# Altium PCB Power.PcbDoc
Units mil, origin at the board's own origin, x right, y up, seen from the top; angles counter-clockwise.
Board outline 1220.47 x 1511.81 mil, 2 copper layers (Top Layer, Bottom Layer), stack 21 mil thick; 47 components, 42 nets, 154 pads, 129 vias.
Unrouted connection lines stored in the file: 29.
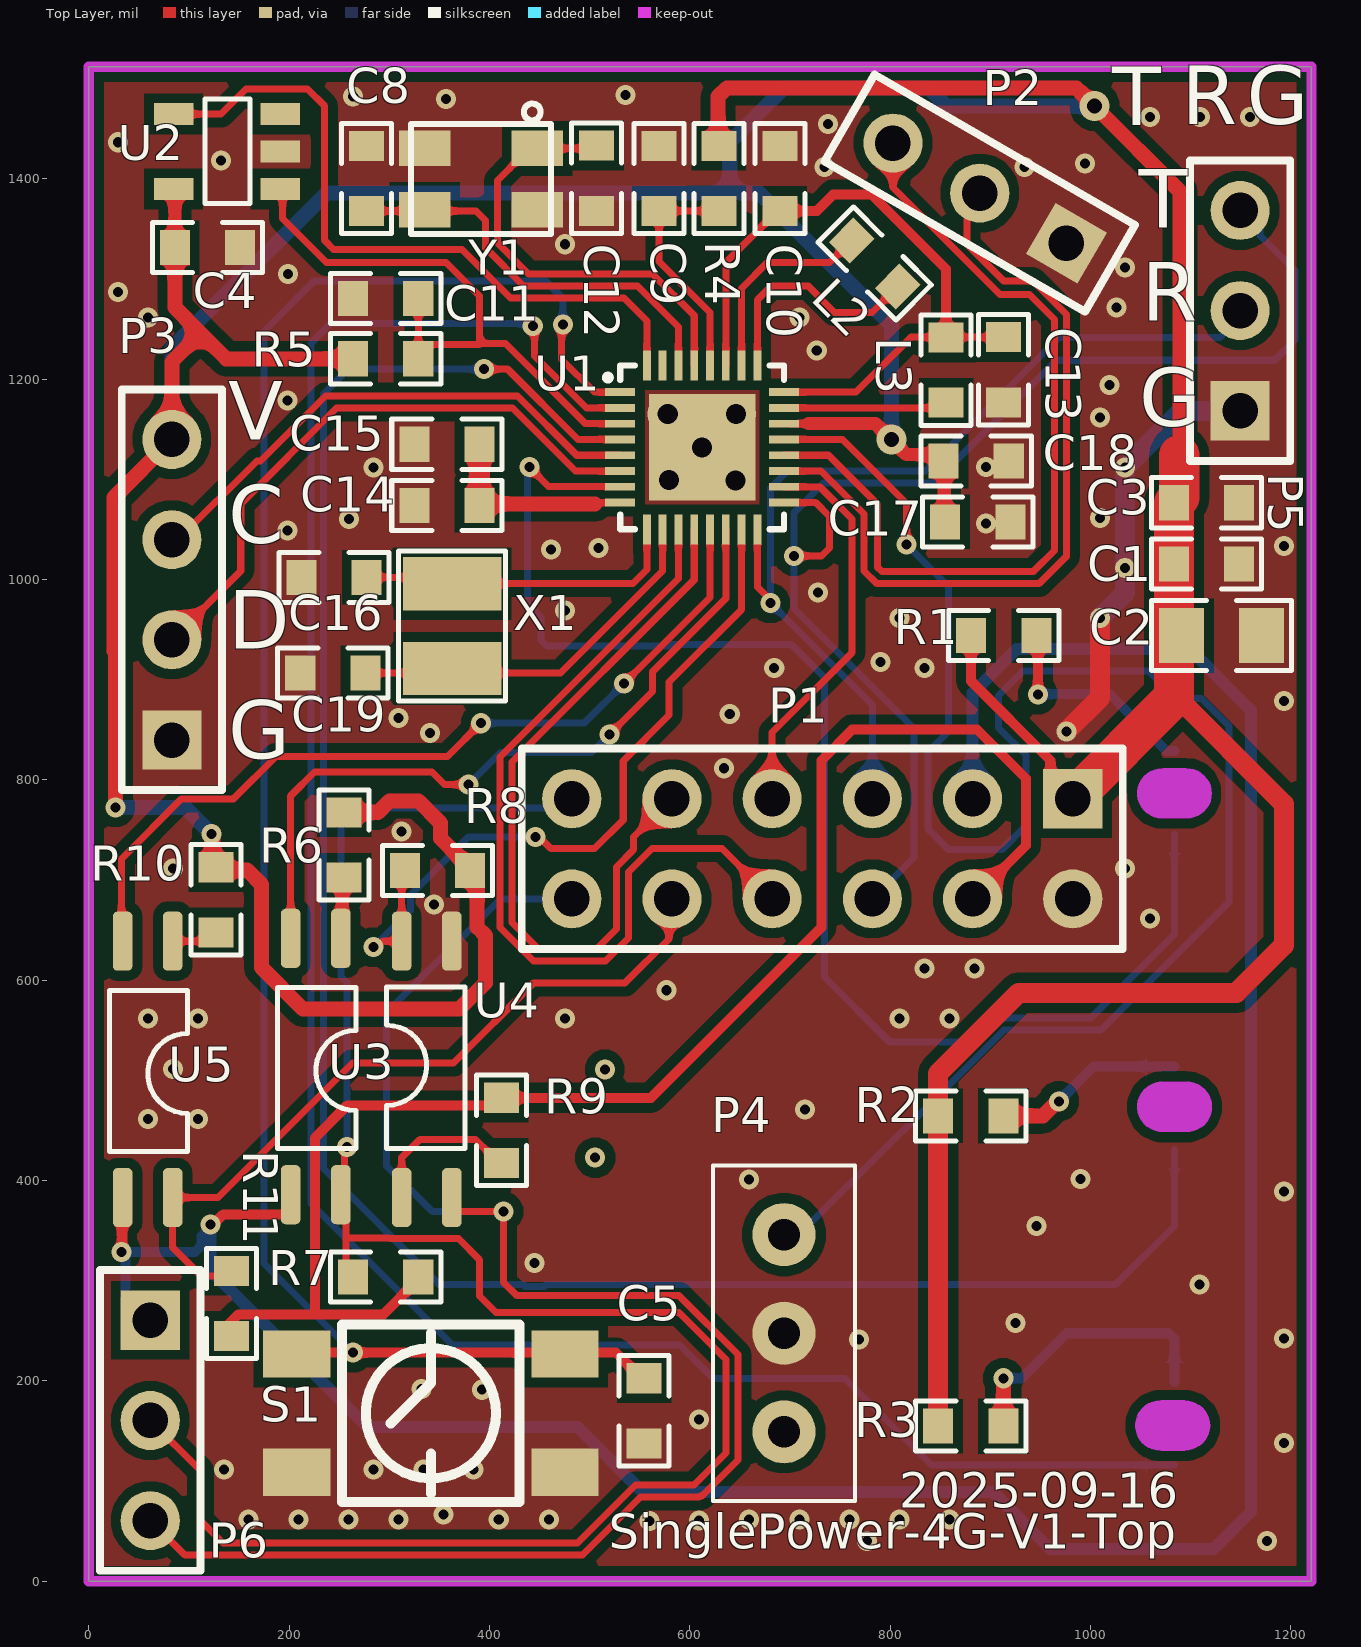
[diagram p0: Top Layer view]
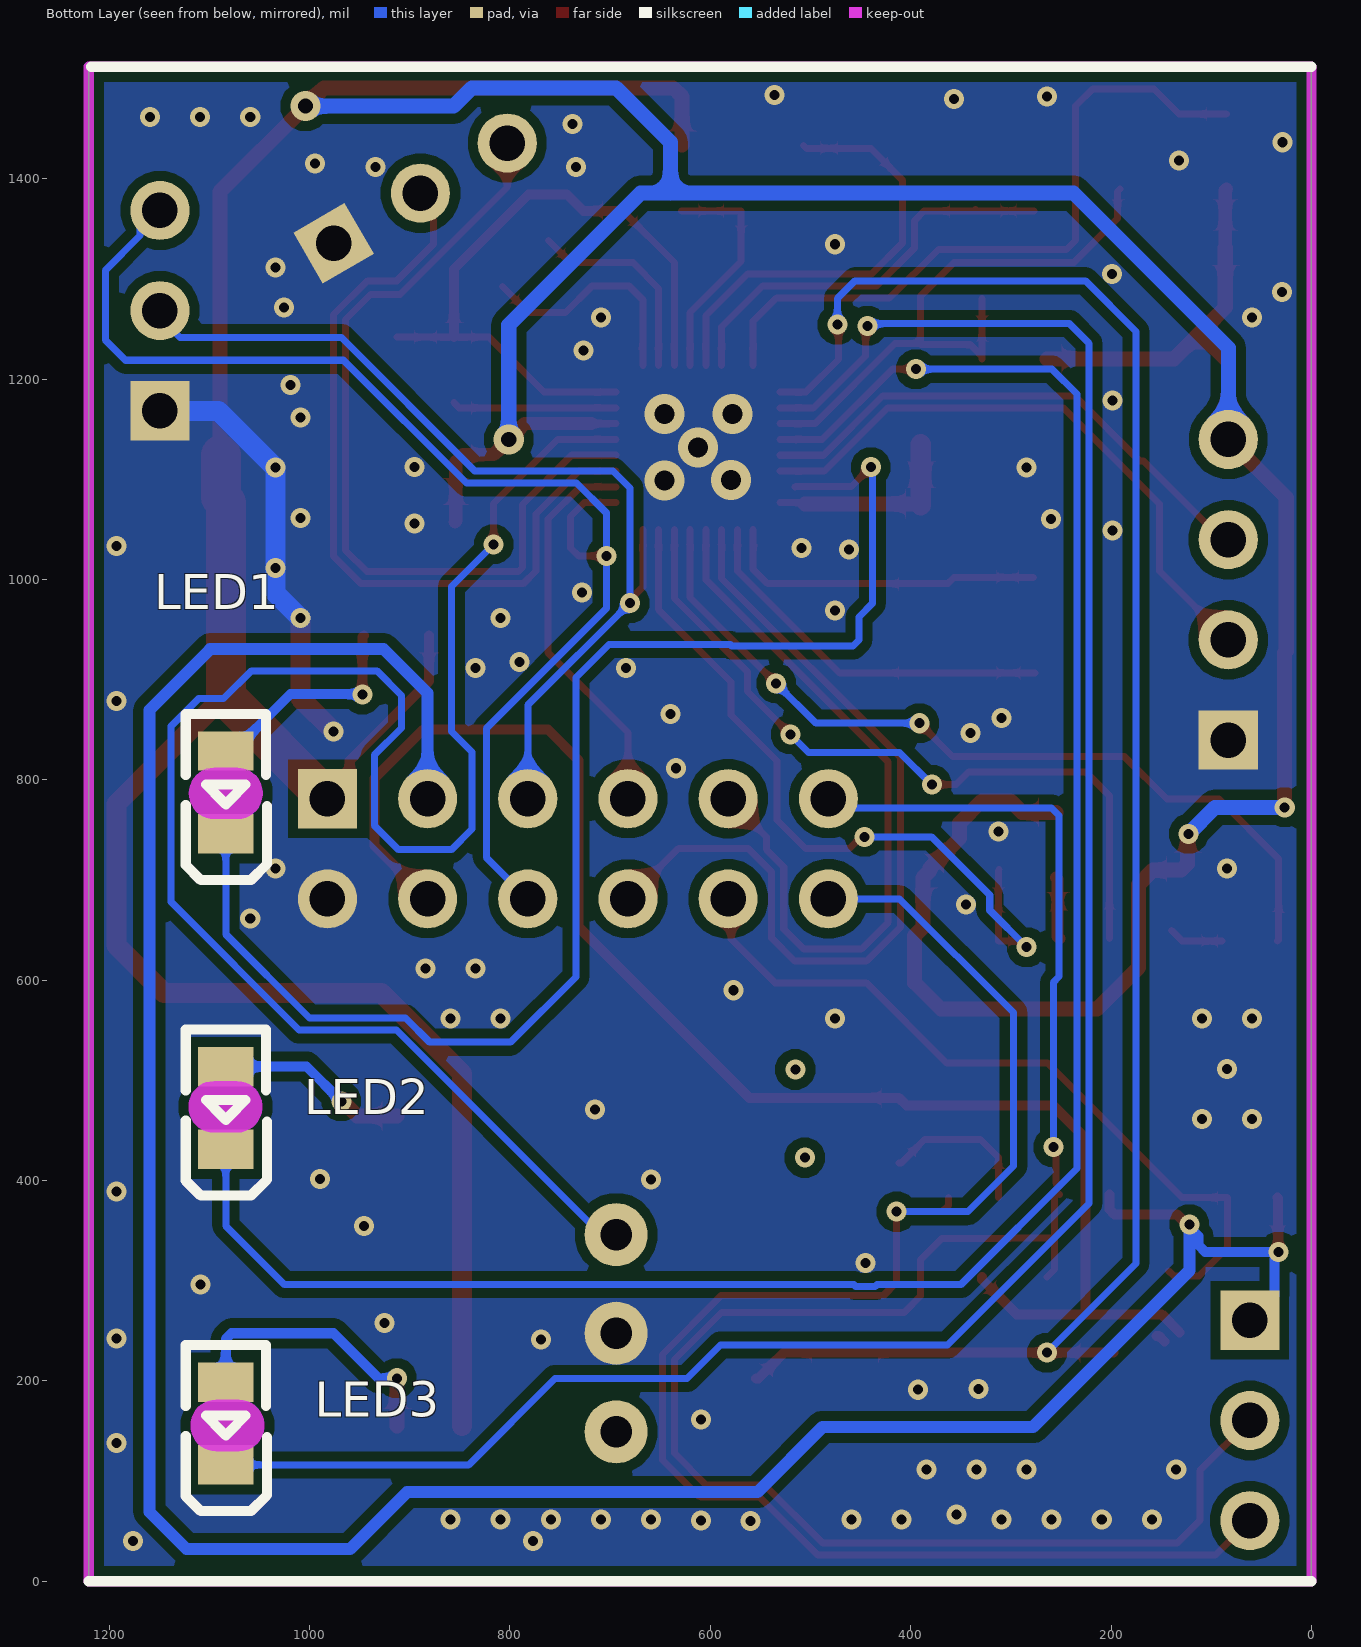
[diagram p1: Bottom Layer view, seen from below]

## Layer stack, top to bottom
Top Solder: solder mask 0.4, Solder Resist, Dk 3.5
Top Layer: signal copper 1.4
Dielectric 2: prepreg 2.8, Composite dielectric, Dk 4.1
Dielectric 1: prepreg 12.6, Composite dielectric, Dk 4.1
Dielectric 3: prepreg 2.8, Composite dielectric, Dk 4.1
Bottom Layer: signal copper 1.4
Bottom Solder: solder mask 0.4, Solder Resist, Dk 3.5

## Board outline
0,0 0,1511.81 1220.47,1511.81 1220.47,0
cut-out: 1070.22,130.42 cw(c1070.22,155.44) 1070.22,180.45 1093.85,180.45 cw(c1093.85,155.44) 1118.87,155.44 cw(c1093.85,155.44) 1093.85,130.42
cut-out: 1072.09,448.6 cw(c1072.09,473.62) 1072.09,498.63 1095.72,498.63 cw(c1095.72,473.62) 1120.74,473.62 cw(c1095.72,473.62) 1095.72,448.6
cut-out: 1071.88,761.52 cw(c1071.88,786.53) 1071.88,811.55 1095.52,811.55 cw(c1095.52,786.53) 1120.53,786.53 cw(c1095.52,786.53) 1095.52,761.52

## Design rules (kind name [scope] priority, off if disabled: settings)
Clearance "Via to pad" [IsVia vs IsPad] p1: gap=10 ignorepadtopadclearanceinfootprint=FALSE
Clearance Ploy [InPoly] p2: gap=10 ignorepadtopadclearanceinfootprint=FALSE
Clearance "Track to pad" [IsTrack vs IsPad] p3: gap=8 ignorepadtopadclearanceinfootprint=FALSE
Clearance "Track to track" [IsTrack vs IsTrack] p4: gap=5 ignorepadtopadclearanceinfootprint=FALSE
Clearance "Via to Track" [IsVia vs IsTrack] p5: gap=10 ignorepadtopadclearanceinfootprint=FALSE
Clearance "Via To Via" [IsVia vs IsVia] p6: gap=10 ignorepadtopadclearanceinfootprint=FALSE
ComponentClearance [All] p1: gap=0 collisioncheckmode=3 verticalgap=0 showdistances=FALSE
DiffPairsRouting [All] p1: maxlimit=10 minlimit=7 mostfreqgap=7 toplayer_minwidth=5 toplayer_maxwidth=100 toplayer_prefwidth=7 bottomlayer_minwidth=5 bottomlayer_maxwidth=100 bottomlayer_prefwidth=7 maxuncoupledlength=500
HoleSize [All] p1: absolutevalues=TRUE maxlimit=200 minlimit=1 maxpercent=80.000 minpercent=20.000
HoleToHoleClearance [All] p1: gap=5 allowstackedmicrovias=TRUE
MinimumSolderMaskSliver [All] p1: minsoldermaskwidth=0
PolygonConnect [All vs (InPadClass('All Pads'))] p1: connectstyle=Direct reliefconductorwidth=10 reliefentries=4 polygonreliefangle="90 Angle" airgapwidth=10
PolygonConnect GND焊盘 [InNet('GND_1') vs (InPadClass('All Pads'))] p2: connectstyle=Relief reliefconductorwidth=10 reliefentries=4 polygonreliefangle="90 Angle" airgapwidth=10
PolygonConnect GND过孔 [All vs IsVia] p3: connectstyle=Direct reliefconductorwidth=10 reliefentries=4 polygonreliefangle="90 Angle" airgapwidth=10
RoutingVias RoutingVias_1 [InNet('AGND_1')] p1: holewidth=10 width=20 viastyle="Through Hole" minholewidth=10 minwidth=20 maxholewidth=28 maxwidth=50
RoutingVias [All] p2: holewidth=10 width=20 viastyle="Through Hole" minholewidth=10 minwidth=20 maxholewidth=28 maxwidth=50
SilkToSilkClearance [All] p1: silktosilkclearance=0
SilkToSolderMaskClearance [IsPad] p1: minsilkscreentomaskgap=0 clearancetoexposedcopper=TRUE
SolderMaskExpansion [All] p1: expansion=1 istentingtop=FALSE
Width [All] p1: maxlimit=300 minlimit=5 preferedwidth=7 minimp=50.000000 maximp=50.000000 favimp=50.000000
23 further rules are at their usual default settings.

## Classes and differential pairs
component class MCU: C4 C5 C8 C9 C10 C11 C12 C13 C14 C15 C16 C17 C18 C19 L2 L3 LED1 LED2 LED3 P2 P3 P4 P5 P6 R1 R2 R3 R4 R5 R6 R7 R8 R9 R10 R11 S1 U1 U2 U3 U4 U5 X1 Y1
component class 连接: C1 C2 C3 P1

## Components (designator, comment, footprint, x,y, rotation, side; value= is the part's Value field where it differs from the comment)
C1 "10uF/25V" 0603R 1148.31,1015.51 r180 top
C2 "22uF/10V" 0805R 1090.81,944 r0 top
C3 "104/10V" 0603R 1148.31,1076.6 r180 top
C4 "104" 0603R 150.99,1331.2 r180 top
C5 "104" 0603R 554.4,202.62 r270 top
C8 "12pF" 0603r 277.11,1432.82 r270 top
C9 "1uF/10V" 0603R 569.33,1432.82 r270 top
C10 "1uF/10V" 0603R 689.97,1432.82 r270 top
C11 "1uF/10V" 0603R 263.93,1280.48 r0 top
C12 "12pF" 0603r 506.95,1368.03 r90 top
C13 "1uF/10V" 0603R 912.97,1176.82 r90 top
C14 "2.2uF/10V" 0603R 324.96,1073.99 r0 top
C15 "104/10V" 0603R 324.96,1135.01 r0 top
C16 "10pF" 0603r 277.45,1002.12 r180 top
C17 "104/10V" 0603R 919.9,1057.45 r180 top
C18 "10uF/10V" 0603R 918.34,1118.1 r180 top
C19 "10pF" 0603r 211.11,906.72 r0 top
L2 "1.3nH" 0603R 761.57,1338.34 r315 top
L3 "4.7uH" 0603R 855.85,1176.44 r90 top
LED1 "LED" LED0805 1083.7,787.4 r90 bottom
LED2 "LED" LED0805 1083.7,472.44 r90 bottom
LED3 "LED" LED0805 1083.7,157.48 r90 bottom
P1 "Header 6X2" HDR2X6 982.2,781.18 r180 top
P2 "Header 3" HDR1X3 976,1335.62 r150 top
P3 "Header 4" HDR1X4 82.95,839.74 r90 top
P4 "Header 3" Ss-12D00 623.17,414.88 r270 top
P5 "Header 3" HDR1X3 1149.38,1168.4 r90 top
P6 "Header 3" HDR1X3 61.41,260.51 r270 top
R1 "Res2" 0603R 880.85,944 r0 top value=1K
R2 "Res2" 0603R 847.97,464.57 r0 top value=1K
R3 "Res2" 0603R 847.97,154.88 r0 top value=1K
R4 "0R/5%" 0603R 628.95,1432.82 r270 top
R5 "10K/5%" 0603R 263.93,1220.31 r0 top
R6 "471" 0603R 254.92,767.46 r270 top
R7 "102" 0603R 263.93,303.67 r0 top
R8 "102" 0603R 315.71,709.54 r0 top
R9 "471" 0603R 411.88,482.62 r270 top
R10 "471" 0603R 126.94,712.76 r270 top
R11 "102" 0603R 142.42,309.89 r270 top
S1 "SW2" 4.5*4.5贴片4脚独立按键 341.47,167.72 r180 top
U1 "N32WB031KEQ6-2" "QFN32 4X4" 612.29,1131.88 r0 top
U2 "CAT823ZTDI-GT3" SOT-23-5 191.07,1389.76 r90 top
U3 "EL3H7" EL3H7 251.61,641.79 r270 top
U4 "EL3H7" EL3H7 312.41,383.04 r90 top
U5 "EL3H7" EL3H7 83.81,638.94 r270 top
X1 "32.768K/7pF" Y3215 362.96,953.48 r90 top
Y1 "32MHZ/8PF" 3225 391.52,1399.74 r0 top

## Footprints (in the part's own frame and the unit in brackets; to place one, negate y for a bottom-side part, rotate by r counter-clockwise, add the part's x,y. Pads: shape width x height; smd on the part's side, far side on the other; paste and mask are expansions set on the pad)
4.5*4.5贴片4脚独立按键 [mm]
  rect 1.7x1.2 smd: 1(-3.4,-1.5) 1(3.4,-1.5) 2(-3.4,1.5) 2(3.4,1.5)
  silkscreen extent -2.25,-2.25 2.25,2.25
0603R [mil]
  rect 30x35 smd: 1(0,0) 2(65,0)
  silkscreen extent -23,-25 88,25
0603r [mil]
  rect 30x35 smd: 1(0,0) 2(65,0)
  silkscreen extent -23,-25 88,25
0805R [mil]
  rect 45x55 smd: 1(0,0) 2(80,0)
  silkscreen extent -30,-35 110,35
3225 [mm]
  rect 1.3x0.9 smd: 1(1.425,0.775) 2(-1.425,0.775) 3(-1.425,-0.775) 4(1.425,-0.775)
  silkscreen extent -1.78,-1.4 1.78,1.91, body extent -1.65,-1.3 1.55,1.2, height 0.61
EL3H7 [mm]
  rrect50% 1.5x0.5 smd: 1(0,0) 2(0,-1.27) 3(6.5,-1.27) 4(6.5,0)
  silkscreen extent 1.24,-1.6 5.33,0.38
HDR1X3 [mm] "Connector; Header; 3 Position"
  rect 1.5x1.5 hole 0.9: 1(0,0)
  round 1.5 hole 0.9: 2(2.54,0) 3(5.08,0)
  silkscreen extent -1.27,-1.27 6.35,1.27
HDR1X4 [mm] "Connector; Header; 4 Position"
  rect 1.5x1.5 hole 0.9: 1(0,0)
  round 1.5 hole 0.9: 2(2.54,0) 3(5.08,0) 4(7.62,0)
  silkscreen extent -1.27,-1.27 8.89,1.27
HDR2X6 [mm] "Connector; Header; 6x2 Position"
  rect 1.5x1.5 hole 0.9: 1(0,0)
  round 1.5 hole 0.9: 2(0,2.54) 3(2.54,0) 4(2.54,2.54) 5(5.08,0) 6(5.08,2.54) 7(7.62,0) 8(7.62,2.54) 9(10.16,0) 10(10.16,2.54) 11(12.7,0) 12(12.7,2.54)
  silkscreen extent -1.27,-1.27 13.97,3.81
LED0805 [mm]
  rect 1x1.4 smd: 1(1.05,0) 2(-1.05,0)
  silkscreen extent -2.22,-1.04 1.99,1.01
"QFN32 4X4" [mm]
  rect 0.76x0.2 smd paste-100 mask+0.051: 1(-2.08,1.4) 2(-2.08,1) 3(-2.08,0.6) 4(-2.08,0.2) 5(-2.08,-0.2) 6(-2.08,-0.6) 7(-2.08,-1) 8(-2.08,-1.4) 17(2.08,-1.4) 18(2.08,-1) 19(2.08,-0.6) 20(2.08,-0.2) 21(2.08,0.2) 22(2.08,0.6) 23(2.08,1) 24(2.08,1.4)
  rect 0.2x0.76 smd paste-100 mask+0.051: 9(-1.4,-2.08) 10(-1,-2.08) 11(-0.6,-2.08) 12(-0.2,-2.08) 13(0.2,-2.08) 14(0.6,-2.08) 15(1,-2.08) 16(1.4,-2.08) 25(1.4,2.08) 26(1,2.08) 27(0.6,2.08) 28(0.2,2.08) 29(-0.2,2.08) 30(-0.6,2.08) 31(-1,2.08) 32(-1.4,2.08)
  rect 2.7x2.7 smd paste-100 mask+0.051: 33(0,0)
  silkscreen extent -2.46,-2.08 2.08,2.08
SOT-23-5 [mm]
  rect 0.55x1 smd: 1(0,0) 2(0.95,0) 3(1.9,0) 4(1.9,2.7) 5(0,2.7)
  silkscreen extent -0.37,0.76 2.29,1.91
Ss-12D00 [mm]
  round 1.6 hole 0.8: 1(1.75,1.8) 2(4.25,1.8) 3(6.75,1.8)
  silkscreen extent 0,0 8.5,3.6
Y3215 [mm]
  rect 1.35x2.5 smd: 1(-1.075,0) 2(1.075,0)
  silkscreen extent -1.9,-1.35 1.9,1.37

## Part data
C1 C4 C5 C8 C12 C16 C19: library part CAP
C2: library part "Cap Pol1", "Polarized Capacitor (Radial)", LatestRevisionDate=17-Jul-2002, LatestRevisionNote="Re-released for DXP Platform.", PackageDescription="Polarized Capacitor (Radial); 2 Leads", PackageReference=RB7.6-15, Published=8-Jun-2000, Publisher="Altium Limited"
C3 C9 C10 C11 C13 C14 C15 C17 C18: library part CAP_1
L2 L3: library part Inductor, "Inductor", Code_IEC=1005, Code_JEITA=0402, LatestRevisionDate=29-May-2009, LatestRevisionNote="IPC-7351 Footprint Added.", PackageDescription="Chip Inductor", PackageReference=0402-A, Published=8-Jun-2000, Publisher="Altium Limited"
P1: "Header, 6-Pin, Dual row", LatestRevisionDate=17-Jul-2002, LatestRevisionNote="Re-released for DXP Platform.", Publisher="Altium Limited"
P2 P4 P5 P6: "Header, 3-Pin", LatestRevisionDate=17-Jul-2002, LatestRevisionNote="Re-released for DXP Platform.", Publisher="Altium Limited"
P3: "Header, 4-Pin", LatestRevisionDate=17-Jul-2002, LatestRevisionNote="Re-released for DXP Platform.", Publisher="Altium Limited"
R4 R5 R6 R7 R8 R9 R10 R11: library part RES
U1: JLCPCB Part Class="Extended Part", Manufacturer=Nations(国民技术), Add into BOM=yes, Convert to PCB=yes, Device=N32WB031KEQ6-2, LCSC Part Name=N32WB031KEQ6-2, Manufacturer Part=N32WB031KEQ6-2, Supplier=LCSC, Supplier Footprint=QFN-32, Supplier Part=C2981446, Symbol=N32WB031KEQ6-2
U2: library part CAT823
U3 U4 U5: library part Optical_Coupler_1
X1: library part XTAL
Y1: library part 12MHz无源
R1 R2 R3: LatestRevisionDate=17-Jul-2002, LatestRevisionNote="Re-released for DXP Platform.", PackageDescription="Axial Device, Thru-Hole; 2 Leads; 0.4 in Pin Spacing", PackageReference=AXIAL-0.4, Published=8-Jun-2000, Publisher="Altium Limited"

## Via types
v1: diameter 20, hole 10, Top Layer to Bottom Layer, 122 vias
v2: diameter 40, hole 20, Top Layer to Bottom Layer, 5 vias
v3: diameter 30, hole 15, Top Layer to Bottom Layer, 2 vias

## Nets (pads, with @x,y where several pads share a name; then routed paths per layer and width w, separated by ;. In a path a pad name is that pad's centre, name@x,y a point inside that pad or via, vN(x,y) a via of type N, cw(c..) or ccw(c..) an arc to the next point about the centre after c; other vN are vias at no path point)
4G_MCU_RXD: P1.6 P5.3 U1.17 | length 1296.2
  Top Layer w7: U1.17 725.69,1076.76 739.49,1062.95 739.49,1031.57 731.37,1023.45 v1(703.86,1023.45)
  Bottom Layer w7: P1.6 823.67,722.64 823.67,851.21 703.86,971.02 v1(703.86,1023.45) 703.86,1066.65 733.46,1096.25 843.53,1096.25 966.11,1218.83 1183.85,1218.83 1203.96,1238.95 1203.96,1308.56 1169.23,1343.3 1169.23,1361.51 P5.3@1159.27,1371.47
4G_MCU_TXD: P1.5 P5.2 U1.16 | length 984.7
  Top Layer w7: U1.16 667.41,992.47 680.36,979.53 v1(680.36,976.43)
  Bottom Layer w7: P1.5 782.2,874.58 v1(680.36,976.43) 680.36,1091.28 697.33,1108.25 835.16,1108.25 968.35,1241.44 1129.24,1241.44 P5.2@1159.27,1271.47
4G_Reset: P1.7 U1.18 | length 393.3
  Top Layer w7: P1.7 682.2,847.09 762.01,926.89 762.01,1060.21 729.71,1092.51 U1.18
BL0942_Control: P1.10 R11.1 U5.4 | length 766
  Top Layer w7: R11.1 137.24,304.71 112.27,304.71 83.81,333.16 U5.4 128.97,383.04 263.29,517.36 364.15,517.36 444.19,597.4 535.41,597.4 579.16,641.15 579.16,678.14 P1.10
BL0942_RXD: P1.11 P6.2 R7.1 U3.4 | length 1960
  Top Layer w7: P6.2 111.41,110.51 111.41,60.51 133.87,38.06 487.81,38.06 545.93,96.17 604.22,96.17 635.93,127.88 635.93,221.42 589.04,268.31 406.47,268.31 390.12,284.66 390.12,320.9 369.01,342.01 300.69,342.01 299.9,342.8 256.58,342.8 ; U3.4 U3.4@254.82,389.1 ; v1(257.64,433.44) 255.16,430.95 255.16,397.33 251.75,393.93 256.58,389.1 256.58,342.8 ; R7.1 256.58,311.01 256.58,342.8 ; P1.11 P1.11@490.3,789.27
  Bottom Layer w7: v1(257.64,433.44) 257.64,597.82 251.9,603.57 251.9,764.43 259.24,771.78 472.8,771.78 P1.11
BL0942_TXD: P1.12 P6.3 U4.2 | length 1669.8
  Top Layer w7: P6.3 95.87,26.06 492.78,26.06 550.9,84.17 609.19,84.17 610.08,85.06 611.97,85.06 647.93,121.01 647.93,226.39 589.28,285.04 427.34,285.04 414,298.38 v1(414,368.9) 368.64,368.9 362.41,375.13 U4.2 ; P1.12 P1.12@482.2,688.65
  Bottom Layer w7: v1(414,368.9) 342.93,368.9 297.41,414.42 297.41,567.61 410.98,681.18 P1.12
Dog_WDI: U1.32 U2.4 | length 701.6
  Top Layer w7: U2.4 131.98,1464.56 157.12,1489.71 218.29,1489.71 235.54,1472.46 235.54,1338.29 244.27,1329.55 372.42,1329.55 421.04,1280.93 534.15,1280.93 557.17,1257.91 U1.32
GND: C1.1 C2.2 C3.1 C4.1 C5.2 C8.1 C9.1 C10.1 C11.1 C12.1 C13.1 C14.1 C15.1 C16.2 C17.1 C18.1 C19.1 P1.2 P2.1 P3.1 P4.2 P5.1 S1.2 U1.33 U2.2 U4.3 Y1.2 Y1.4 | length 425.9
  Top Layer w20: v1(976.09,848.42) 1009.27,881.59 v1(1009.27,961.56)
  Bottom Layer w20: v1(1009.27,961.56) 1034.27,986.56 v1(1034.27,1011.56) v1(1034.27,1111.56) 1091.11,1168.4 P5.1
  other v1: 776.83,40 1176.36,40 559.95,59.99 609.27,60.67 159.27,61.56 209.27,61.56 259.27,61.56 309.27,61.56 409.27,61.56 459.27,61.56 659.27,61.56 709.27,61.56 759.27,61.56 809.27,61.56 859.27,61.56 354.33,66.5 134.91,111.56 284.27,111.56 334.27,111.56 384.27,111.56 1193,138.02 609.27,161.56 332.36,191.92 392.75,191.17 768.98,241.26 1193,242.34 925.08,257.74 1108.8,296.01 445.11,317.9 945.85,354.7 1193,389.1 659.27,400.89 989.76,401.41 59.27,461.56 109.27,461.56 714.97,471.13 84.27,511.56 59.27,561.56 109.27,561.56 475.59,561.56 809.27,561.56 859.27,561.56 576.86,589.94 834.27,611.56 884.27,611.56 1059.27,661.56 344.57,675.41 84.27,711.56 1034.27,711.56 312.41,748.26 634.27,811.56 340.43,846.75 309.27,861.56 639.86,865.85 1193,878.67 684.27,911.56 834.27,911.56 790.41,917.7 809.27,961.56 475.59,969 727.98,986.82 461.52,1030.05 508.91,1031.57 1193,1033.39 198.4,1048.99 895.47,1055.88 259.95,1060.21 1009.27,1061.56 284.27,1111.56 895.47,1112.19 1009.27,1161.56 198.4,1178.55 1018.97,1193.94 726.72,1228.72 59.27,1261.56 709.27,1261.56 1025.72,1271.47 29.27,1287.07 199.02,1304.98 1034.27,1311.56 475.59,1334.62 734.27,1411.56 934.27,1411.56 994.45,1415.32 131.98,1418.03 29.03,1436.44 737.72,1454.74 1059.27,1461.56 1109.27,1461.56 1159.27,1461.56 356.73,1479.76 263.93,1481.99 535.91,1483.56
  other v2: 645.73,1098.86 579.37,1099.41 612.29,1131.88 577.96,1165.38 645.89,1165.3
GND_G: P1.3 P6.1 U3.3 U5.3 | length 2782.5
  Top Layer w10: v1(32.63,328.76) 33.22,329.35 33.22,382.45 U5.3 ; v1(121.71,356.33) 124.42,356.33 134.37,366.28 196.77,366.28 201.61,371.12 U3.3
  Bottom Layer w10: P6.1 36.89,285.04 36.89,321.79 32.63,326.05 v1(32.63,328.76) 105.96,328.76 112.73,335.53 112.73,344.64 v1@121.71,353.62
  Bottom Layer w12: v1(121.71,356.33) 121.71,353.62 121.71,310.19 277.94,153.96 488.03,153.96 552.83,89.15 902.58,89.15 959.73,32 1122.81,32 1160.05,69.24 1160.05,869.59 1099.24,930.4 926.09,930.4 882.2,886.52 P1.3
Key_button: C5.1 S1.1 U1.1 | length 1883.5
  Top Layer w7: v1(473.2,1254.33) 471.97,1253.1 471.97,1219.77 504.75,1187 U1.1
  Top Layer w10: S1.1@197.73,228.21 465.45,228.21 526.31,228.21 551.9,202.62 C5.1
  Bottom Layer w7: v1(263.93,228.21) 174.9,317.23 174.9,1247.6 225.48,1298.18 455.72,1298.18 473.2,1280.7 v1(473.2,1254.33)
LED_Alarm: LED2.2 U1.4 | length 2108.5
  Top Layer w7: v1(394.74,1209.88) 418.21,1209.88 488.34,1139.75 U1.4
  Bottom Layer w7: v1(394.74,1209.88) 258.74,1209.88 234.14,1185.28 234.14,411.86 349.99,296.01 433.76,296.01 435.38,294.4 454.85,294.4 456.46,296.01 1025.01,296.01 1083.7,354.7 LED2.2
LED_Gate: LED3.2 U1.2 | length 2196.5
  Top Layer w7: v1(443.22,1253.08) 445.11,1251.19 445.11,1223.05 496.91,1171.25 U1.2
  Bottom Layer w7: v1(443.22,1253.08) 440.99,1255.32 241.43,1255.32 221.9,1235.79 221.9,377.1 363.07,235.93 589.86,235.93 623.39,202.4 754.88,202.4 841.15,116.13 LED3.2
LED_RUN: LED1.2 U1.7 | length 1382.1
  Top Layer w7: v1(439.75,1112.19) 459.12,1092.82 515.13,1092.82 U1.7@515.44,1092.51
  Bottom Layer w7: v1(439.75,1112.19) 438.02,1110.46 438.02,976.22 451.54,962.7 451.54,939.75 457.55,933.75 578.73,933.75 580.05,935.06 701.24,935.06 734.27,902.03 734.27,603.33 799.53,538.06 880.11,538.06 904.36,562.3 1000.17,562.3 1083.7,645.83 LED1.2
LPUART_RXD: P2.3 U1.20 | length 854.4
  Top Layer w7: U1.20 738.58,1124.01 787.57,1075.02 787.57,1011.88 791.67,1007.78 942.87,1007.78 964,1028.9 964,1259.62 939.15,1284.46 909.76,1284.46 802.79,1391.43 P2.3
LPUART_TXD: P2.2 U1.19 | length 799.1
  Top Layer w7: U1.19 730.93,1108.26 774.01,1065.18 774.01,1008.47 786.7,995.78 948.62,995.78 976,1023.15 976,1264.59 942.4,1298.18 913.01,1298.18 876.57,1334.62 876.57,1358.71 889.39,1371.53 P2.2
MCU_BL0942_Control: U1.13 U5.2 | length 846.1
  Top Layer w7: U5.2 32.63,640.13 32.63,720.99 92.36,780.73 144.27,780.73 186.79,823.25 358.1,823.25 v1(391.34,856.49) ; v1(534.26,896.3) 620.16,982.2 U1.13
  Bottom Layer w7: v1(391.34,856.49) 494.46,856.49 v1(534.26,896.3)
MCU_RESET: C11.2 R5.2 U1.3 U2.1 | length 609.8
  Top Layer w7: U2.1 193.44,1387.39 193.44,1360.14 237.23,1316.36 356.73,1316.36 389.96,1283.12 389.96,1234.34 344.53,1234.34 ; C11.2 R5.2 328.93,1222.81 340.43,1234.31 344.5,1234.31 ; 389.96,1235.36 415.83,1235.36 495.69,1155.5 U1.3
Module: P4.1 U1.21 | length 1777.4
  Top Layer w7: U1.21 752.4,1139.75 816.32,1075.83 v1(816.32,1035.03)
  Bottom Layer w7: P4.1 709.15,345.99 913.47,550.3 1010.58,550.3 1138.15,677.87 1138.15,853.6 1110.71,881.04 1085.88,881.04 1058.04,908.88 932.79,908.88 908.25,884.34 908.25,851.8 935.47,824.59 935.47,754.27 911.41,730.22 858.38,730.22 837.77,750.83 837.77,827.84 858.35,848.42 858.35,993 v1(816.32,1035.03)
NetC9_2: C9.2 R4.2 U1.28 | length 234.7
  Top Layer w7: U1.28 620.16,1266.59 569.33,1317.42 C9.2 R4.2
NetC10_2: C10.2 C13.2 L3.2 U1.24 U1.27 | length 690.9
  Top Layer w7: U1.27 635.91,1316.26 687.47,1367.82 C10.2 ; U1.24 765.93,1187 820.76,1241.82 855.85,1241.82 C13.2
  Top Layer w10: C10.2 726.72,1367.82 743.15,1384.25 781.46,1384.25 855.85,1309.86 L3.2@855.85,1241.82
NetC14_2: C14.2 C15.2 U1.8 | length 201.8
  Top Layer w7: 506.14,1075.95 506.95,1076.76 U1.8
  Top Layer w15: C14.2 391.34,1075.36 505.55,1075.36
  Top Layer w20: C14.2 C15.2
NetL2_1: L2.1 U1.26 | length 206.5
  Top Layer w7: U1.26 651.66,1290.63 677.3,1316.26 739.49,1316.26 L2.1
NetL2_2: L2.2 U1.25 | length 232.6
  Top Layer w7: U1.25 667.41,1279.18 680.95,1292.72 718.38,1292.72 744.51,1266.59 781.74,1266.59 L2.2
NetL3_1: L3.1 U1.23 | length 163.8
  Top Layer w7: U1.23 850.66,1171.25 L3.1
NetLED1_1: LED1.1 R1.2 | length 219.5
  Top Layer w10: R1.2 947.4,942.45 v1(947.4,885.2)
  Bottom Layer w10: v1(947.4,885.2) 947.82,885.62 1018.97,885.62 1075.84,828.75 LED1.1
NetLED2_1: LED2.1 R2.2 | length 191.1
  Top Layer w15: R2.2 952.51,464.57 967,479.05 v1(968.35,479.05)
  Bottom Layer w10: v1(968.35,479.05) 1003.09,513.79 LED2.1
NetLED3_1: LED3.1 R3.2 | length 282.4
  Top Layer w15: R3.2 v1(912.97,202.62)
  Bottom Layer w10: v1(912.97,202.62) 931.15,202.62 976.09,247.56 1077.85,247.56 1083.7,241.7 LED3.1
NetR6_2: R6.2 U3.1 | length 62
  Top Layer w12: U3.1 253.26,643.44 253.26,700.8 R6.2
NetR9_2: R9.2 U4.1 | length 156.5
  Top Layer w7: U4.1 312.41,422.93 330.43,440.94 386.06,440.94 409.38,417.62 R9.2
NetR10_2: R10.2 U5.1 | length 54.7
  Top Layer w7: U5.1@89.05,638.94 128.93,638.94 R10.2@139.42,649.43
Relay_C_A: P1.9 U1.12 | length 744.3
  Top Layer w7: P1.9 543.95,742.92 543.95,730.22 526.71,712.98 526.71,651.14 506.75,631.18 448.86,631.18 422.41,657.64 422.41,817.67 604.42,999.69 U1.12
Relay_C_B: P1.8 U1.11 | length 862.7
  Top Layer w7: U1.11 588.67,1000.91 410.41,822.64 410.41,652.66 443.89,619.18 515.82,619.18 538.71,642.07 538.71,708.01 562.1,731.39 631.99,731.39 P1.8
SWCLK: P3.3 U1.5 | length 531.3
  Top Layer w7: P3.3 89.28,1039.74 167.76,1118.22 171.31,1118.22 236.15,1183.06 428.05,1183.06 487.1,1124.01 U1.5
SWDIO: P3.2 U1.6 | length 608.4
  Top Layer w7: P3.2 151.72,1008.51 151.72,1075.29 247.49,1171.06 423.08,1171.06 485.88,1108.26 U1.6
USART2_RXD: R8.1 U1.15 U4.4 | length 762
  Top Layer w7: v1(284.22,632.93) 287.74,632.93 293.76,638.94 U4.4 312.41,709.54 R8.1@311.61,710.34 ; v1(445.91,743.16) 449.42,743.16 461.19,731.39 504.9,731.39 533.55,760.05 533.55,818.9 579.4,864.74 579.4,897.53 651.66,969.8 U1.15
  Bottom Layer w7: v1(284.22,632.93) 321.07,669.77 321.07,685.14 379.08,743.16 v1(445.91,743.16)
USART2_TXD: U1.14 U3.2 | length 749
  Top Layer w7: U3.2 201.61,784.07 225.28,807.74 342.46,807.74 354.93,795.28 v1(378.94,795.28) ; v1(519.87,845.36) 562.88,888.36 562.88,907.94 635.91,980.97 U1.14
  Bottom Layer w7: v1(378.94,795.28) 411.14,827.47 501.99,827.47 v1(519.87,845.36)
VCC33: C1.2 C2.1 C3.2 C4.2 C17.2 C18.2 P1.1 P3.4 R1.1 R2.1 R3.1 R4.1 R5.1 R6.1 R8.2 R10.1 U1.22 U2.5 | length 5825.6
  Top Layer w7: U1.22 718.38,1155.5
  Top Layer w10: R1.1 880.85,898.43 960.02,819.26 960.02,803.37 P1.1
  Top Layer w13: U2.5 85.99,1388.54 C4.2 ; 718.38,1155.5 785.47,1155.5 v3(801.22,1139.74) 816.32,1124.65 846.8,1124.65 C18.2 854.12,1117.32 854.12,1058.23 C17.2
  Top Layer w15: v1(26.61,772.55) 26.61,927.15 25.11,928.65 25.11,1081.9 P3.4 82.95,1217.27 111.57,1245.89 ; C4.2 85.99,1271.47 111.57,1245.89 ; v1(122.6,746.05) 123.55,745.1 123.55,716.14 R10.1 129.84,709.85 158.15,709.85 172.42,695.58 172.42,612.57 213.99,571 369.55,571 395.95,597.4 395.95,644.6 387.75,652.8 387.75,702.5 R8.2 380.71,712.04 351.13,741.63 351.13,756.94 329.04,779.02 300.22,779.02 288.66,767.46 R6.1 ; R5.1 137.15,1220.31 111.57,1245.89 ; R4.1@628.24,1433.53 628.24,1481.99 637.03,1490.78 985.84,1490.78 v3(1004.16,1472.46) 1089.38,1387.24 1089.38,1124.79
  Top Layer w20: R3.1 R2.1 847.97,506.98 928.35,587.36 1145.56,587.36 1193,634.8 1193,775.93 1083.31,885.62
  Top Layer w40: P1.1 1083.31,882.28 1083.31,885.62 C3.2 1088.6,1081.89 1088.6,1124
  Bottom Layer w15: v1(26.61,772.55) 96.1,772.55 v1(122.6,746.05) ; P3.4 82.95,1231.27 237.3,1385.62 639.85,1385.62 ; v3(801.22,1139.74) 801.22,1254.07 669.67,1385.62 639.85,1385.62 ; v3(1004.16,1472.46) 856.3,1472.46 837.99,1490.78 694.19,1490.78 639.85,1436.44 639.85,1385.62
VCC33_G: P1.4 R7.2 R9.1 R11.2 | length 1546.8
  Top Layer w10: R11.2@131.52,248.53 149.45,266.46 225.68,266.46 ; R11.2@146.59,239.28 152.29,244.98 R11.2@154.65,244.98 ; R7.2 328.93,301.17 294.22,266.46 225.68,266.46 ; P1.4 935.47,734.44 935.47,801.25 886.54,850.17 762.14,850.17 731.37,819.41 731.37,652.8 561.19,482.62 R9.1 404.3,475.04 258.14,475.04 225.68,442.58 225.68,266.46
XIN_32K: C16.1 U1.9 X1.2 | length 328.3
  Top Layer w7: C16.1 356.64,1002.12 X1.2 543.15,995.8 557.17,1009.83 U1.9
XO32MP_IN: C8.2 U1.30 Y1.3 | length 415.3
  Top Layer w7: C8.2 Y1.3@335.42,1367.82 ; Y1.3 Y1.3@335.42,1367.82 ; U1.30 588.67,1252.14 547.88,1292.93 434.15,1292.93 395.95,1331.12 395.95,1358.5 386.63,1367.82 Y1.3@335.42,1367.82
XO32MP_OUT: C12.2 U1.29 Y1.1 | length 451.9
  Top Layer w7: C12.2 504.17,1430.25 Y1.1 439.75,1430.25 407.95,1398.46 407.95,1336.09 439.06,1304.98 562.88,1304.98 604.42,1263.44 U1.29
XOUT_32K: C19.2 U1.10 X1.1 | length 380.4
  Top Layer w7: C19.2 471.03,906.72 572.92,1008.61 U1.10
pads on no net: P4.3 U1.31 U2.3
copper on no net:
  other v1: 505.55,422.93 515.13,510.85

## Polygon pours and split planes (outlines as drawn)
GND on Top Layer "NONET_L-01_P-001" (solid, remove dead copper, pour order 0): -193,1641 -173,1661 1611,1661 1611,-160 1516,-255 -424,-255 -424,1417 -187,1654 -186,1654
GND on Bottom Layer "NONET_L-01_P-001" (solid, remove dead copper, pour order 1): -305,1672 1581,1672 1549,1640 1549,-243 -349,-243 -399,-293 -454,-238 -454,1513 -306,1661

## Keep-outs
Keep-Out Layer:
  lines w10: 0,0 0,1511.81 570.87,1511.81 649.61,1511.81 1220.47,1511.81 1220.47,0 649.61,0 570.87,0 0,0
  lines w50: 1070.22,155.44 1093.85,155.44 ; 1071.88,786.53 1095.52,786.53 ; 1072.09,473.62 1095.72,473.62

## Silkscreen, mask and mechanical layers (free items; w line width, h text height)
Top Overlay:
  text "G" at 1155.75,1435.1 h100
  text "R" at 1091.11,1434.95 h100
  text "T" at 1021.57,1433.74 h100
  text "T" at 1047.99,1331.7 h100
  text "R" at 1051.11,1238.61 h100
  text "G" at 1048.6,1133.65 h100
  text "V" at 139.33,1120.07 h100
  text "C" at 139.33,1016.66 h100
  text "D" at 139.37,911.15 h100
  text "G" at 139.42,801.44 h100
  text "2025-09-16" at 809.27,62 h60
  text "SinglePower-4G-V1-Top" at 519,20.86 h60
Bottom Overlay:
  lines w10: 0,0 1220.47,0 ; 0,1511.81 1218,1511.81